# Altium PCB CL-KB-V1.2.pcbdoc (part 1 of 3)
Units mil, origin at the board's own origin, x right, y up, seen from the top; angles counter-clockwise.
Board outline 3269.95 x 5989.25 mil, 2 copper layers (Top Layer, Bottom Layer); 76 components, 86 nets, 398 pads, 855 vias.
Unrouted connection lines stored in the file: 1.
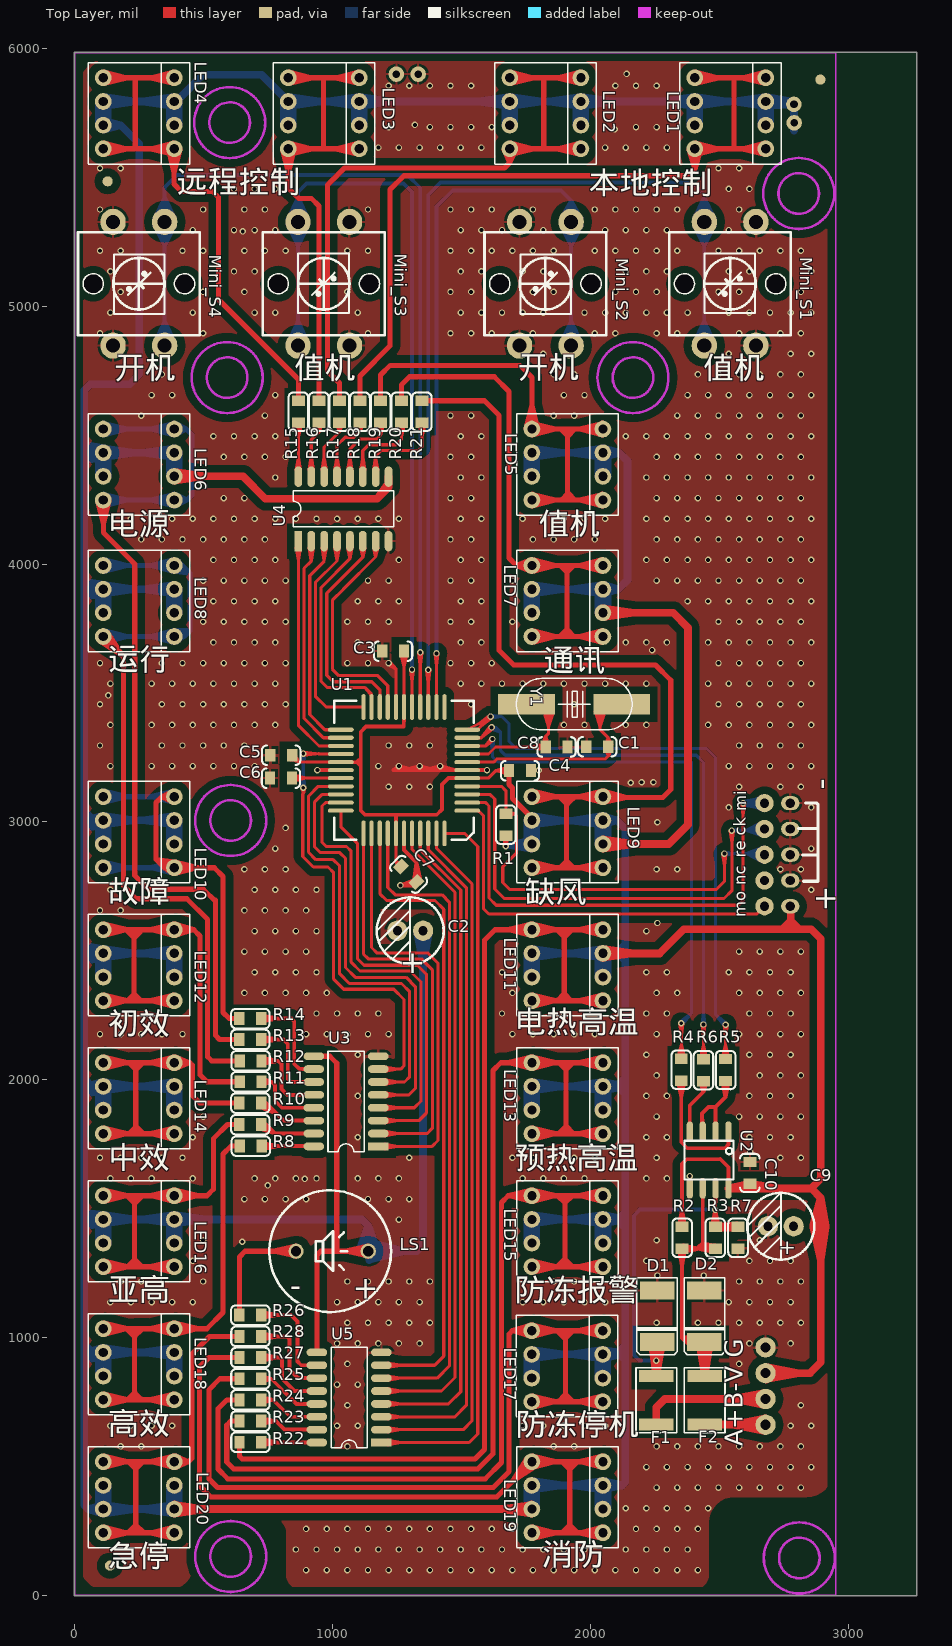
[diagram p0: Top Layer view]
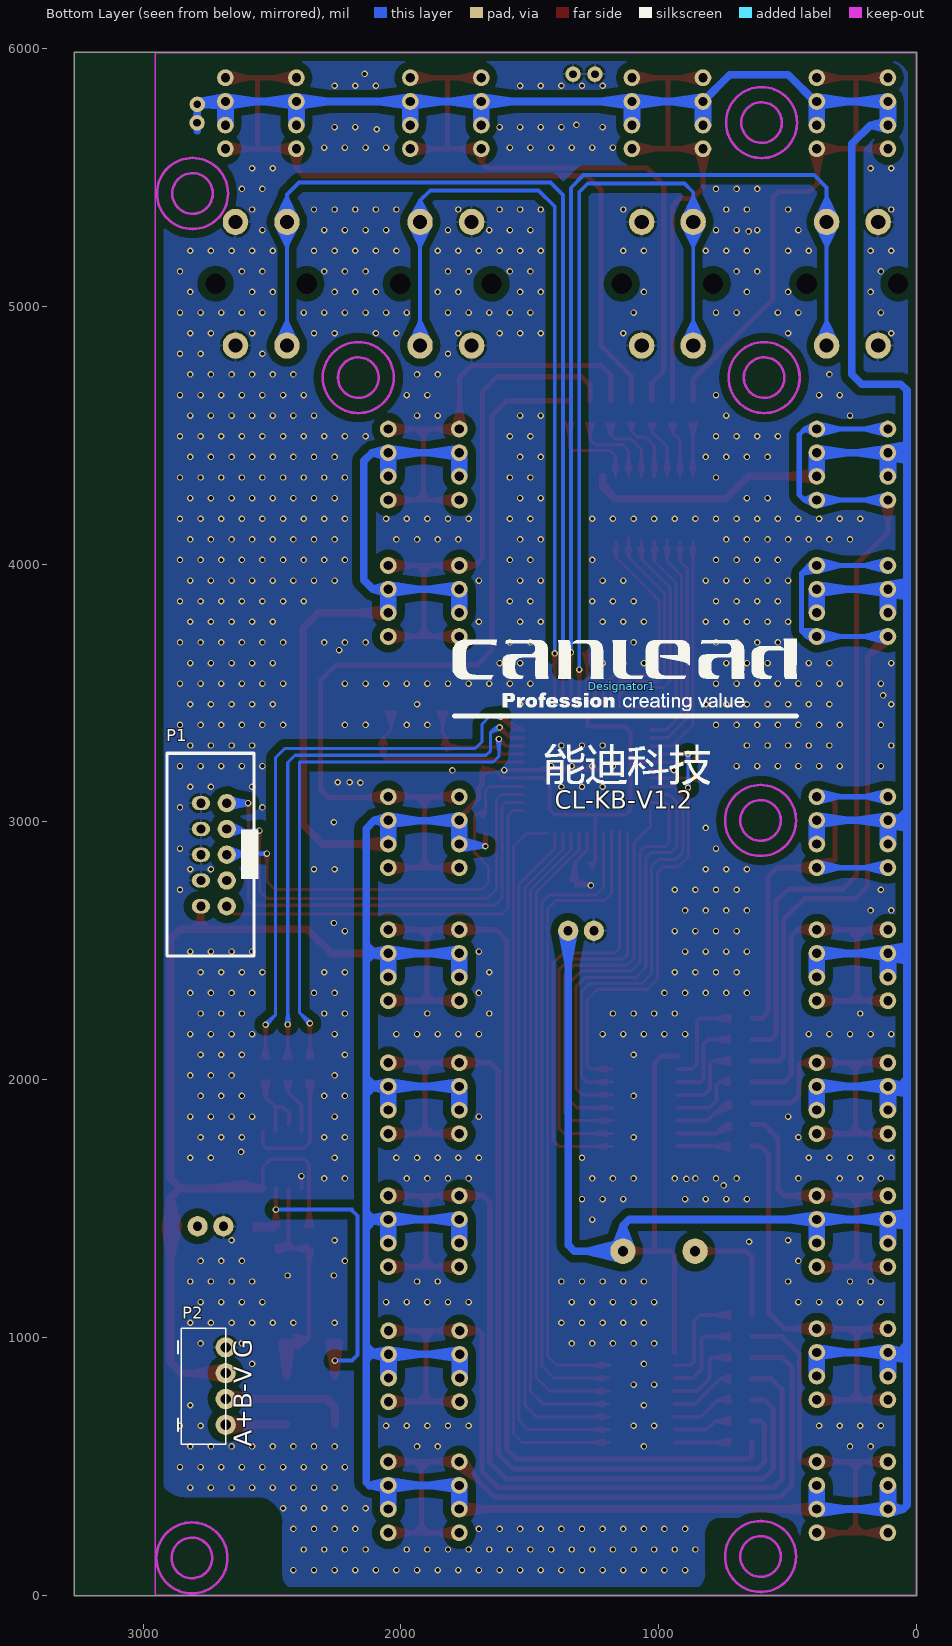
[diagram p1: Bottom Layer view, seen from below]

## Layer stack, top to bottom
Top Solder: solder mask 0.4, Solder Resist, Dk 3.5
Top Layer: signal copper 1.4
Dielectric1: core 12.6, FR-4, Dk 4.8
Bottom Layer: signal copper 1.4
Bottom Solder: solder mask 0.4, Solder Resist, Dk 3.5

## Board outline
-2.5,-2.5 3267.45,-2.5 3267.45,5986.75 -2.5,5986.75

## Design rules (kind name [scope] priority, off if disabled: settings)
Clearance Clearance_1 [All] p1 off: gap=30
Clearance [All] p2: gap=10
ComponentClearance [All] p1 off: gap=10 collisioncheckmode=3 verticalgap=10 showdistances=FALSE
FabricationTestPointUsage TestPointUsage [All] p1 off: valid=0 allowmultiple=FALSE
FabricationTestpoint Testpoint [All] p1 off: side=3 testpointundercomponent=TRUE minsize=40 maxsize=100 preferedsize=60 minholesize=0 maxholesize=40 preferedholesize=32 testpointgrid=1 allowsidetop=TRUE allowsidebottom=TRUE usegrid=TRUE gridtolerance=0.01
Height [All] p1 off: minheight=0 maxheight=1000 prefheight=500
HoleSize [All] p1 off: absolutevalues=TRUE maxlimit=100 minlimit=1 maxpercent=80.000 minpercent=20.000
LayerPairs [All] p1 off: enforce=TRUE
PolygonConnect PolygonConnect_1 [IsVia] p1: connectstyle=Direct reliefconductorwidth=10 reliefentries=4 polygonreliefangle="90 Angle" airgapwidth=10
PolygonConnect [All] p2: connectstyle=Relief reliefconductorwidth=10 reliefentries=4 polygonreliefangle="90 Angle" airgapwidth=10
RoomDefinition CL-KB-V1.2 [InComponentClass('CL-KB-V1.2')] p1: confinementstyle=ConfineIn formatcopy=TRUE lockcomponents=FALSE outline -17662.73,-10943.24 -15662.73,-10943.24 -15662.73,-9943.24 -17662.73,-9943.24
RoutingVias [All] p1: holewidth=28 width=50 viastyle="Through Hole" minholewidth=28 minwidth=50 maxholewidth=28 maxwidth=50
SolderMaskExpansion [All] p1: expansion=4
Width [All] p1: maxlimit=30 minlimit=10 preferedwidth=15 minimp=50.000000 maximp=50.000000 favimp=50.000000
23 further rules are at their usual default settings.

## Components (designator, comment, footprint, x,y, rotation, side; value= is the part's Value field where it differs from the comment)
C1 "22p" c0805c 2027,3292 r180 top
C2 "10uf" E6.5MM 1351,2578 r180 top
C3 "104" c0805c 1234.5,3663 r0 top
C4 "104" c0805c 1727,3199 r180 top
C5 "104" c0805c 800.5,3259 r180 top
C6 "104" c0805c 799.5,3170 r0 top
C7 "104" c0805c 1295,2797 r135 top
C8 "22p" c0805c 1869,3291 r0 top
C9 "104" c0805c 2619,1638 r90 top
C10 "220uf" E6.5MM 2789,1431 r180 top
D1 "SMBJ6.8" SMBJ_SMT 2259,1081.75 r270 top
D2 "SMBJ6.8" SMBJ_SMT 2442.97,1081.75 r270 top
Designator1 "Comment" ND 1143,3527 r180 bottom
F1 "X14" PPTC_SMT 2255.94,755.96 r90 top
F2 "X14" PPTC_SMT 2443.95,755.96 r90 top
LED1 "GREEN" PLED10*10 2543.28,5750 r0 top
LED2 "GREEN" PLED10*10 1825.56,5750 r0 top
LED3 "GREEN" PLED10*10 965.72,5750 r0 top
LED4 "GREEN" PLED10*10 248,5750 r0 top
LED5 "GREEN" PLED10*10 1910.99,4387.01 r0 top
LED6 "GREEN" PLED10*10 248,4387.01 r0 top
LED7 "GREEN" PLED10*10 1910.99,3857.48 r0 top
LED8 "GREEN" PLED10*10 248,3857.48 r0 top
LED9 "RED" PLED10*10 1910.99,2960.24 r0 top
LED10 "RED" PLED10*10 248,2960.24 r0 top
LED11 "RED" PLED10*10 1910.99,2444.09 r0 top
LED12 "RED" PLED10*10 248,2444.09 r0 top
LED13 "RED" PLED10*10 1910.99,1927.95 r0 top
LED14 "RED" PLED10*10 248,1927.95 r0 top
LED15 "RED" PLED10*10 1910.99,1411.81 r0 top
LED16 "RED" PLED10*10 248,1411.81 r0 top
LED17 "RED" PLED10*10 1910,888 r0 top
LED18 "RED" PLED10*10 248,895.67 r0 top
LED19 "RED" PLED10*10 1910.99,379.53 r0 top
LED20 "RED" PLED10*10 248,379.53 r0 top
LS1 "Speaker" SPK 1138,1334 r180 top
Mini_S1 "" KEYL 2542.28,5088.58 r270 top
Mini_S2 "" KEYL 1825.56,5088.58 r90 top
Mini_S3 "" KEYL 965.72,5088.58 r270 top
Mini_S4 "" KEYL 248,5088.58 r90 top
P1 "CON10" ISP 2726,2873 r270 bottom
P2 "Header 4" C3-4L 2680,811 r270 bottom
R1 "10K" 0805C 1672,3032 r270 top
R2 "3K" 0805C 2356,1429 r270 top
R3 "10K" 0805C 2485,1429 r270 top
R4 "100" 0805C 2353,1996 r90 top
R5 "100" 0805C 2525,1995 r90 top
R6 "100" 0805C 2439,1994 r90 top
R7 "3K" 0805C 2573,1344 r90 top
R8 "1K" 0805C 640,1742 r0 top
R9 "1K" 0805C 637.75,1825.54 r0 top
R10 "1K" 0805C 638,1909 r0 top
R11 "1K" 0805C 639,1992 r0 top
R12 "5.1K" 0805C 639,2073 r0 top
R13 "5.1K" 0805C 638,2156 r0 top
R14 "1K" 0805C 638,2237 r0 top
R15 "5.1K" 0805C 866.98,4634.52 r270 top
R16 "5.1K" 0805C 946.7,4634.52 r270 top
R17 "5.1K" 0805C 1026.43,4634.52 r270 top
R18 "5.1K" 0805C 1106.15,4634.52 r270 top
R19 "5.1K" 0805C 1185.88,4634.52 r270 top
R20 "5.1K" 0805C 1266.58,4634.52 r270 top
R21 "1K" 0805C 1346.31,4634.52 r270 top
R22 "1K" 0805C 638.45,593.17 r0 top
R23 "1K" 0805C 638.45,674.87 r0 top
R24 "1K" 0805C 638.45,757.55 r0 top
R25 "1K" 0805C 638.45,839.24 r0 top
R26 "3K" 0805C 723.09,1086.29 r180 top
R27 "1K" 0805C 638.45,921.92 r0 top
R28 "1K" 0805C 638.45,1003.61 r0 top
U1 "Atmega16" QFP44 1277,3201 r180 top
U2 "U485" SOP8 2461,1688 r180 top
U3 "2003" SO_16 1052,1916 r90 top
U4 "2003" SO_16 1042,4215 r0 top
U5 "2003" SO_16 1063.98,766.73 r90 top
Y1 "8M" XTP2 1937.27,3456.76 r0 top

## Footprints (in the part's own frame and the unit in brackets; to place one, negate y for a bottom-side part, rotate by r counter-clockwise, add the part's x,y. Pads: shape width x height; smd on the part's side, far side on the other; paste and mask are expansions set on the pad)
0805C [mil]
  rect 40x50 smd: 1(0,0) 2(85,0)
  silkscreen extent -32,-38 117,38
C3-4L [mm]
  round 2 hole 1: 1(-3.81,0) 2(-1.27,0) 3(1.27,0) 4(3.81,0)
  silkscreen extent -5.72,-4.7 5.71,0
c0805c [mil]
  rect 40x50 smd: 1(-42.5,0) 2(42.5,0)
  silkscreen extent -75,-38 75,38
E6.5MM [mm]
  round 2 hole 0.9: 1(0,0) 2(2.54,0)
  silkscreen extent -2.03,-3.3 4.57,3.3
ISP [mil]
  round 70.87 hole 36: 1(200,50) 3(100,50) 5(0,50) 7(-100,50) 9(-200,50)
  oval 55x70.87 hole 36: 2(200,-50) 4(100,-50) 6(0,-50) 8(-100,-50) 10(-200,-50)
  silkscreen extent -394,-181 394,173
KEYL [mil]
  round 65 hole 78.74 unplated: 0(0,177.17) 0(0,-177.17)
  oval 102x98 hole 55: 1(-240,-100) 1(240,-100) 2(-240,100) 2(240,100)
  silkscreen extent -200,-236 200,236
ND [mil]
  silkscreen extent -655,-382 679,182
PLED10*10 [mil]
  round 65 hole 36: A(-137.8,-45.93) A(-137.8,45.93) A(137.8,-45.93) A(137.8,45.93) K(-137.8,-137.8) K(-137.8,137.8) K(137.8,-137.8) K(137.8,137.8)
  silkscreen extent -197,-197 197,197
PPTC_SMT [mm]
  rect 1.2x3.4 smd: 1(-2.4,0) 2(2.4,0)
  silkscreen extent -3.2,-2 3.2,2
QFP44 [mil]
  oval 100x16 smd: 1(-245,157) 2(-245,126) 3(-245,94) 4(-245,63) 5(-245,31) 6(-245,0) 7(-245,-31) 8(-245,-63) 9(-245,-94) 10(-245,-126) 11(-245,-157) 23(245,-157) 24(245,-126) 25(245,-94) 26(245,-63) 27(245,-31) 28(245,0) 29(245,31) 30(245,63) 31(245,94) 32(245,126) 33(245,157)
  oval 16x100 smd: 12(-157,-245) 13(-126,-245) 14(-94,-245) 15(-63,-245) 16(-31,-245) 17(0,-245) 18(31,-245) 19(63,-245) 20(94,-245) 21(126,-245) 22(157,-245) 34(157,245) 35(126,245) 36(94,245) 37(63,245) 38(31,245) 39(0,245) 40(-31,245) 41(-63,245) 42(-94,245) 43(-126,245) 44(-157,245)
  silkscreen extent -270,-270 270,270
SMBJ_SMT [mil]
  rect 70x133.86 smd: A(-100,0) K(100,0)
  silkscreen extent -150,-79 149,79
SO_16 [mil]
  rect 30x80 smd: 1(-175,-125)
  oval 30x80 smd: 2(-125,-125) 3(-75,-125) 4(-25,-125) 5(25,-125) 6(75,-125) 7(125,-125) 8(175,-125) 9(175,125) 10(125,125) 11(75,125) 12(25,125) 13(-25,125) 14(-75,125) 15(-125,125) 16(-175,125)
  silkscreen extent -195,-70 195,70
SOP8 [mil]
  oval 24x80 smd: 1(-75,-110) 2(-25,-110) 3(25,-110) 4(75,-110) 5(75,110) 6(25,110) 7(-25,110) 8(-75,110)
  silkscreen extent -95,-75 95,75
SPK [mm]
  round 1.5 / inner round 1.5 / far side round 2.5 hole 1: 1(-0.007,-0.008) 2(7.105,-0.008)
  silkscreen extent -2.26,-6.01 9.74,5.99
XTP2 [mil]
  rect 220x80 smd: 1(-185,0) 2(185,0)
  silkscreen extent -225,-100 225,100

## Part data
C1 C3 C4 C5 C6 C7 C8 C9: library part Cap, "Capacitor"
C2 C10: library part "Cap Pol1", "Polarized Capacitor (Radial)"
D1 D2: library part DIODE, "Diode"
F1 F2: library part "Fuse 1", "Fuse"
LED1 LED2 LED3 LED4 LED5 LED6 LED7 LED8 LED9 LED10 LED11 LED12 LED13 LED14 LED15 LED16 LED17 LED18 LED19 LED20: library part LED, "Zener Diode"
LS1: "Loudspeaker"
Mini_S1 Mini_S2 Mini_S3 Mini_S4: library part SW-PB, "Switch"
P1: library part SPI10
P2: "Header, 4-Pin"
R1 R2 R3 R4 R5 R6 R7 R8 R9 R10 R11 R12 R13 R14 R15 R16 R17 R18 R19 R20 R21 R22 R23 R24 R25 R26 R27 R28: library part RES2
U3 U4 U5: library part ULN2003A, "High-Voltage, High-Current Darlington Array"
Y1: library part XTAL, "Crystal Oscillator"

## Free pads (board coordinates)
  round 60 hole 30: 0(1247,5902) 1(1332,5902) 3(2790,5785) 4(2791,5713)
  round 39.37 smd: 1(126.92,5486.07) 1(135.83,114.17) 1(2892.67,5880.75)
  round 86.61 on Top Solder: 2(126.92,5486.07) 2(135.83,114.17) 2(1231.25,219.34) 2(2605.27,69.73) 2(2892.67,5880.75)

## Via types
v1: diameter 25, hole 15, Top Layer to Bottom Layer, tented both sides, 855 vias

## Nets (pads, with @x,y where several pads share a name; then routed paths per layer and width w, separated by ;. In a path a pad name is that pad's centre, name@x,y a point inside that pad or via, vN(x,y) a via of type N, cw(c..) or ccw(c..) an arc to the next point about the centre after c; other vN are vias at no path point)
AREF: C6.2 U1.29 | length 346
  Top Layer w12: C6.2@842,3170 U1.29@1032,3170 ; C6.2@843.75,3156.11 898,3170 C6.2@843.75,3183.89 ; 946,3170 U1.29@990,3170
DE/RE: R5.2 U1.11 | length 3190.7
  Top Layer w12: v1@1606.51,3402.51 U1.11@1522,3358 1562,3358 v1(1613,3409) ; v1@1608.13,3413.31 1575.04,3371.04 ; v1@1609.32,3414.36 1569.32,3382.92 ; v1@1615.97,3403.22 1569.32,3382.92 ; v1@1617.31,3404.13 1575.04,3371.04 ; R5.2@2511.11,2081.75 2525,2136 R5.2@2538.89,2081.75 ; v1@2518.51,2212.56 2525,2164.5 ; R5.2@2525,2080 v1(2525,2213) 2525,2164.5 ; v1@2531.49,2212.56 2525,2164.5 ; 1569.32,3382.92 v1(1613,3409) ; 1575.04,3371.04 v1(1613,3409)
  Bottom Layer w12: v1(1613,3409) 1656,3409 ; v1@1613.49,3402.52 1656,3409 ; v1@1613.49,3415.48 1656,3409 ; v1@2520.13,2208.69 2487.04,2250.96 ; v1@2529.31,2217.87 2487.04,2250.96 ; 1656,3409 1685,3380 1685,3312 1712,3285 2451,3285 2486,3250 2486,2252 v1(2525,2213) 2487.04,2250.96
GND: C1.2 C2.2 C3.1 C4.1 C5.2 C6.1 C7.1 C8.2 C9.2 C10.2 D1.A D2.A Mini_S1.2 Mini_S2.2 Mini_S3.2 Mini_S4.2 P1.4 P1.6 P1.8 P1.10 P2.1 pad.0 pad.1@1332,5902 R7.1 U1.6 U1.18 U1.28 U1.39 U2.5 U3.8 U4.8 U5.8 | length 2285.9
  Top Layer w12: v1@1213.7,3611.32 1246,3594 ; v1(1217.27,3616.76) 1246,3594 ; v1@1220,3620 1246,3594 ; v1@1221.74,3621.48 1246,3594 ; U1.18@1246,3446 1246,3594 ; U1.18@1246,3488 1246,3532
  Top Layer w15: U1.28@990,3201 v1(941,3201) U1.28@1032,3201 ; 1273.62,3201 v1(1337.27,3216.76) 1401.56,3201 ; U1.39@1277,2914 1277,2891.5 ; U1.39@1277,2956 1277,2891.5 ; C7.1@1316.1,2770.97 1325.05,2840.23 ; C7.1@1318.24,2775.48 v1(1263,2754) ; C7.1@1321.52,2763.41 v1(1263,2754) ; 1321.8,3201 v1(1257.27,3216.76) 1235,3201 U1.6@1522,3201 v1(1599,3201) ; C7.1@1322.19,2750.93 v1(1263,2754) ; C7.1@1328.59,2770.48 1325.05,2840.23 ; C7.1@1340.96,2772.23 1325.05,2840.23 ; 1352.99,3201 v1(1417.27,3216.76) ; U1.6@1480.94,3201 v1(1417.27,3216.76) ; U1.6@1541.5,3201 v1(1599,3201) ; v1(1263,2754) 1312.1,2754 C7.1@1325.05,2766.95 1325.05,2843.45 1277,2891.5 ; v1(1417.27,3216.76) 1427,3201 1480,3201 v1(1417.27,3216.76) ; v1(1599,3201) 1564,3201 v1(1599,3201) ; v1(2386,1626) U2.5@2386,1578 v1(2386,1626) ; v1(2386,1626) 2386,1606 v1(2386,1626)
  other v1: 897.27,96.76 977.27,96.76 1057.27,96.76 1137.27,96.76 1217.27,96.76 1297.27,96.76 1377.27,96.76 1457.27,96.76 1537.27,96.76 1617.27,96.76 1697.27,96.76 1777.27,96.76 1857.27,96.76 1937.27,96.76 2017.27,96.76 2097.27,96.76 2177.27,96.76 2257.27,96.76 2337.27,96.76 2417.27,96.76 857.27,176.76 937.27,176.76 1017.27,176.76 1097.27,176.76 1177.27,176.76 1257.27,176.76 1337.27,176.76 1417.27,176.76 1497.27,176.76 1577.27,176.76 1657.27,176.76 1737.27,176.76 1817.27,176.76 1897.27,176.76 1977.27,176.76 2137.27,176.76 2217.27,176.76 2297.27,176.76 2377.27,176.76 897.27,256.76 977.27,256.76 1057.27,256.76 1137.27,256.76 1217.27,256.76 1297.27,256.76 1377.27,256.76 1457.27,256.76 1537.27,256.76 1617.27,256.76 1697.27,256.76 2177.27,256.76 2257.27,256.76 2337.27,256.76 2417.27,256.76 2137.27,336.76 2217.27,336.76 2297.27,336.76 2377.27,336.76 2457.27,336.76 2257.27,416.76 2337.27,416.76 2417.27,416.76 2497.27,416.76 2577.27,416.76 2657.27,416.76 2737.27,416.76 2817.27,416.76 2217.27,496.76 2297.27,496.76 2377.27,496.76 2457.27,496.76 2537.27,496.76 2617.27,496.76 2697.27,496.76 2777.27,496.76 2857.27,496.76 177.27,576.76 257.27,576.76 1057.27,576.76 1857.27,576.76 1937.27,576.76 2257.27,576.76 2337.27,576.76 2417.27,576.76 2497.27,576.76 2577.27,576.76 2657.27,576.76 2737.27,576.76 2817.27,576.76 137.27,656.76 217.27,656.76 297.27,656.76 377.27,656.76 1017.27,656.76 1097.27,656.76 1737.27,656.76 1817.27,656.76 1897.27,656.76 1977.27,656.76 2057.27,656.76 2777.27,656.76 2857.27,656.76 1057.27,736.76 2817.27,736.76 1017.27,816.76 1097.27,816.76 1057.27,896.76 2577.27,896.76 1017.27,976.76 1097.27,976.76 1177.27,976.76 1257.27,976.76 1337.27,976.76 2617.27,976.76 2777.27,976.76 1057.27,1056.76 1137.27,1056.76 1217.27,1056.76 1297.27,1056.76 1377.27,1056.76 2257.27,1056.76 2417.27,1056.76 2497.27,1056.76 2577.27,1056.76 2657.27,1056.76 2737.27,1056.76 2817.27,1056.76 137.27,1136.76 217.27,1136.76 297.27,1136.76 377.27,1136.76 457.27,1136.76 1017.27,1136.76 1097.27,1136.76 1177.27,1136.76 1257.27,1136.76 1337.27,1136.76 1737.27,1136.76 1817.27,1136.76 1897.27,1136.76 1977.27,1136.76 2057.27,1136.76 2537.27,1136.76 2617.27,1136.76 2697.27,1136.76 2777.27,1136.76 177.27,1216.76 257.27,1216.76 497.27,1216.76 1057.27,1216.76 1137.27,1216.76 1217.27,1216.76 1297.27,1216.76 1377.27,1216.76 1857.27,1216.76 1937.27,1216.76 2577.27,1216.76 2657.27,1216.76 2737.27,1216.76 2817.27,1216.76 2260,1240 2440,1240 457.27,1296.76 2217.27,1296.76 2617.27,1296.76 2697.27,1296.76 2777.27,1296.76 649,1371 497.27,1376.76 2257.27,1376.76 2657.27,1376.76 1257.27,1456.76 657.27,1536.76 737.27,1536.76 817.27,1536.76 897.27,1536.76 1137.27,1536.76 1217.27,1536.76 1297.27,1536.76 748,1590 892,1615 137.27,1616.76 217.27,1616.76 297.27,1616.76 457.27,1616.76 697.27,1616.76 777.27,1616.76 857.27,1616.76 937.27,1616.76 1097.27,1616.76 1177.27,1616.76 1257.27,1616.76 1737.27,1616.76 1817.27,1616.76 1897.27,1616.76 1977.27,1616.76 2217.27,1616.76 2297.27,1616.76 97.27,1696.76 177.27,1696.76 257.27,1696.76 337.27,1696.76 417.27,1696.76 1297.27,1696.76 1697.27,1696.76 1777.27,1696.76 1857.27,1696.76 1937.27,1696.76 2017.27,1696.76 2257.27,1696.76 2737.27,1696.76 2817.27,1696.76 2620,1720 457.27,1776.76 1097.27,1776.76 2217.27,1776.76 2297.27,1776.76 2617.27,1776.76 2697.27,1776.76 2777.27,1776.76 497.27,1856.76 1697.27,1856.76 2257.27,1856.76 2577.27,1856.76 2657.27,1856.76 2737.27,1856.76 2817.27,1856.76 1097.27,1936.76 2217.27,1936.76 2297.27,1936.76 2617.27,1936.76 2697.27,1936.76 2777.27,1936.76 2257.27,2016.76 2657.27,2016.76 2737.27,2016.76 2817.27,2016.76 1097.27,2096.76 2217.27,2096.76 2617.27,2096.76 2697.27,2096.76 2777.27,2096.76 97.27,2176.76 177.27,2176.76 257.27,2176.76 337.27,2176.76 417.27,2176.76 897.27,2176.76 977.27,2176.76 1057.27,2176.76 1137.27,2176.76 1217.27,2176.76 1697.27,2176.76 1777.27,2176.76 1857.27,2176.76 1937.27,2176.76 2017.27,2176.76 2257.27,2176.76 2577.27,2176.76 2657.27,2176.76 2737.27,2176.76 2817.27,2176.76 217.27,2256.76 937.27,2256.76 1017.27,2256.76 1097.27,2256.76 1177.27,2256.76 1657.27,2256.76 1897.27,2256.76 2217.27,2256.76 2297.27,2256.76 2617.27,2256.76 2697.27,2256.76 2777.27,2256.76 657.27,2336.76 737.27,2336.76 817.27,2336.76 897.27,2336.76 977.27,2336.76 1697.27,2336.76 2257.27,2336.76 2337.27,2336.76 2577.27,2336.76 2657.27,2336.76 2737.27,2336.76 2817.27,2336.76 697.27,2416.76 777.27,2416.76 857.27,2416.76 937.27,2416.76 1657.27,2416.76 2217.27,2416.76 2297.27,2416.76 2537.27,2416.76 2617.27,2416.76 2697.27,2416.76 2777.27,2416.76 657.27,2496.76 737.27,2496.76 817.27,2496.76 897.27,2496.76 1697.27,2496.76 2577.27,2496.76 2657.27,2496.76 2737.27,2496.76 2817.27,2496.76 697.27,2576.76 777.27,2576.76 857.27,2576.76 937.27,2576.76 2217.27,2576.76 2260,2608 97.27,2656.76 177.27,2656.76 657.27,2656.76 737.27,2656.76 817.27,2656.76 897.27,2656.76 137.27,2736.76 697.27,2736.76 777.27,2736.76 857.27,2736.76 937.27,2736.76 2857.27,2736.76 657.27,2816.76 737.27,2816.76 817.27,2816.76 2257.27,2816.76 2337.27,2816.76 2737.27,2816.76 2817.27,2816.76 777.27,2896.76 2857.27,2896.76 817.27,2976.76 2260,2999 2537.27,3056.76 2857.27,3056.76 1217.27,3136.76 1297.27,3136.76 1377.27,3136.76 2577.27,3136.76 2737.27,3136.76 2817.27,3136.76 2157,3152 2199,3154 2245,3154 1800,3200 137.27,3216.76 297.27,3216.76 377.27,3216.76 457.27,3216.76 537.27,3216.76 617.27,3216.76 697.27,3216.76 1177.27,3216.76 2537.27,3216.76 2617.27,3216.76 2697.27,3216.76 2777.27,3216.76 2857.27,3216.76 97.27,3296.76 337.27,3296.76 417.27,3296.76 497.27,3296.76 577.27,3296.76 657.27,3296.76 1217.27,3296.76 1297.27,3296.76 1377.27,3296.76 2577.27,3296.76 2657.27,3296.76 2737.27,3296.76 2817.27,3296.76 137.27,3376.76 297.27,3376.76 377.27,3376.76 457.27,3376.76 537.27,3376.76 617.27,3376.76 697.27,3376.76 777.27,3376.76 1897.27,3376.76 1977.27,3376.76 2137.27,3376.76 2217.27,3376.76 2457.27,3376.76 2537.27,3376.76 2617.27,3376.76 2697.27,3376.76 2777.27,3376.76 2857.27,3376.76 97.27,3456.76 337.27,3456.76 417.27,3456.76 497.27,3456.76 577.27,3456.76 657.27,3456.76 737.27,3456.76 817.27,3456.76 1537.27,3456.76 1937.27,3456.76 2497.27,3456.76 2577.27,3456.76 2657.27,3456.76 2737.27,3456.76 2817.27,3456.76 129,3491 137.27,3536.76 297.27,3536.76 377.27,3536.76 457.27,3536.76 537.27,3536.76 617.27,3536.76 697.27,3536.76 777.27,3536.76 1497.27,3536.76 1577.27,3536.76 1657.27,3536.76 1737.27,3536.76 1817.27,3536.76 1897.27,3536.76 1977.27,3536.76 2057.27,3536.76 2137.27,3536.76 2217.27,3536.76 2457.27,3536.76 2537.27,3536.76 2617.27,3536.76 2697.27,3536.76 2777.27,3536.76 2857.27,3536.76 97.27,3616.76 337.27,3616.76 417.27,3616.76 497.27,3616.76 577.27,3616.76 657.27,3616.76 737.27,3616.76 817.27,3616.76 1057.27,3616.76 1137.27,3616.76 1457.27,3616.76 1537.27,3616.76 1617.27,3616.76 2497.27,3616.76 2577.27,3616.76 2657.27,3616.76 2737.27,3616.76 2817.27,3616.76 2240,3667 537.27,3696.76 617.27,3696.76 697.27,3696.76 777.27,3696.76 1097.27,3696.76 1497.27,3696.76 1577.27,3696.76 2137.27,3696.76 2217.27,3696.76 2297.27,3696.76 2457.27,3696.76 2537.27,3696.76 2617.27,3696.76 2697.27,3696.76 2777.27,3696.76 2857.27,3696.76 497.27,3776.76 577.27,3776.76 657.27,3776.76 737.27,3776.76 817.27,3776.76 1057.27,3776.76 1137.27,3776.76 1217.27,3776.76 1457.27,3776.76 1537.27,3776.76 1697.27,3776.76 2497.27,3776.76 2577.27,3776.76 2657.27,3776.76 2737.27,3776.76 2817.27,3776.76 537.27,3856.76 617.27,3856.76 697.27,3856.76 777.27,3856.76 1097.27,3856.76 1177.27,3856.76 1257.27,3856.76 1497.27,3856.76 1577.27,3856.76 2377.27,3856.76 2457.27,3856.76 2537.27,3856.76 2617.27,3856.76 2697.27,3856.76 2777.27,3856.76 2857.27,3856.76 497.27,3936.76 577.27,3936.76 657.27,3936.76 737.27,3936.76 817.27,3936.76 1137.27,3936.76 1217.27,3936.76 1457.27,3936.76 1537.27,3936.76 1697.27,3936.76 2257.27,3936.76 2337.27,3936.76 2417.27,3936.76 2497.27,3936.76 2577.27,3936.76 2657.27,3936.76 2737.27,3936.76 2817.27,3936.76 537.27,4016.76 617.27,4016.76 697.27,4016.76 777.27,4016.76 1257.27,4016.76 1497.27,4016.76 1577.27,4016.76 2217.27,4016.76 2297.27,4016.76 2377.27,4016.76 2457.27,4016.76 2537.27,4016.76 2617.27,4016.76 2697.27,4016.76 2777.27,4016.76 2857.27,4016.76 257.27,4096.76 337.27,4096.76 417.27,4096.76 497.27,4096.76 577.27,4096.76 657.27,4096.76 737.27,4096.76 1457.27,4096.76 1537.27,4096.76 1777.27,4096.76 1857.27,4096.76 1937.27,4096.76 2017.27,4096.76 2257.27,4096.76 2337.27,4096.76 2417.27,4096.76 2497.27,4096.76 2577.27,4096.76 2657.27,4096.76 2737.27,4096.76 2817.27,4096.76 217.27,4176.76 297.27,4176.76 377.27,4176.76 457.27,4176.76 537.27,4176.76 617.27,4176.76 697.27,4176.76 777.27,4176.76 857.27,4176.76 937.27,4176.76 1017.27,4176.76 1097.27,4176.76 1177.27,4176.76 1257.27,4176.76 1497.27,4176.76 1577.27,4176.76 1737.27,4176.76 1817.27,4176.76 1897.27,4176.76 1977.27,4176.76 2057.27,4176.76 2217.27,4176.76 2297.27,4176.76 2377.27,4176.76 2457.27,4176.76 2537.27,4176.76 2617.27,4176.76 2697.27,4176.76 2777.27,4176.76 2857.27,4176.76 577.27,4256.76 657.27,4256.76 1457.27,4256.76 1537.27,4256.76 2257.27,4256.76 2337.27,4256.76 2417.27,4256.76 2497.27,4256.76 2577.27,4256.76 2657.27,4256.76 2737.27,4256.76 2817.27,4256.76 777.27,4336.76 1497.27,4336.76 1577.27,4336.76 2217.27,4336.76 2297.27,4336.76 2377.27,4336.76 2457.27,4336.76 2537.27,4336.76 2617.27,4336.76 2697.27,4336.76 2777.27,4336.76 2857.27,4336.76 577.27,4416.76 657.27,4416.76 737.27,4416.76 817.27,4416.76 1457.27,4416.76 1537.27,4416.76 2257.27,4416.76 2337.27,4416.76 2417.27,4416.76 2497.27,4416.76 2577.27,4416.76 2657.27,4416.76 2737.27,4416.76 2817.27,4416.76 537.27,4496.76 617.27,4496.76 697.27,4496.76 777.27,4496.76 1497.27,4496.76 1577.27,4496.76 2137.27,4496.76 2217.27,4496.76 2297.27,4496.76 2377.27,4496.76 2457.27,4496.76 2537.27,4496.76 2617.27,4496.76 2697.27,4496.76 2777.27,4496.76 2857.27,4496.76 257.27,4576.76 737.27,4576.76 1457.27,4576.76 1537.27,4576.76 1857.27,4576.76 1937.27,4576.76 2337.27,4576.76 2417.27,4576.76 2497.27,4576.76 2577.27,4576.76 2657.27,4576.76 2737.27,4576.76 2817.27,4576.76 297.27,4656.76 377.27,4656.76 777.27,4656.76 1897.27,4656.76 1977.27,4656.76 2377.27,4656.76 2457.27,4656.76 2537.27,4656.76 2617.27,4656.76 2697.27,4656.76 2777.27,4656.76 2857.27,4656.76 337.27,4736.76 1857.27,4736.76 1937.27,4736.76 2417.27,4736.76 2497.27,4736.76 2577.27,4736.76 2657.27,4736.76 2737.27,4736.76 2817.27,4736.76 1817.27,4816.76 2537.27,4816.76 2777.27,4816.76 2857.27,4816.76 97.27,4896.76 497.27,4896.76 1137.27,4896.76 1457.27,4896.76 1537.27,4896.76 1617.27,4896.76 1777.27,4896.76 2017.27,4896.76 2097.27,4896.76 2257.27,4896.76 2337.27,4896.76 2577.27,4896.76 2737.27,4896.76 2817.27,4896.76 137.27,4976.76 457.27,4976.76 537.27,4976.76 697.27,4976.76 777.27,4976.76 1097.27,4976.76 1497.27,4976.76 1577.27,4976.76 1657.27,4976.76 1737.27,4976.76 1817.27,4976.76 1977.27,4976.76 2057.27,4976.76 2137.27,4976.76 2217.27,4976.76 2297.27,4976.76 2377.27,4976.76 2537.27,4976.76 2617.27,4976.76 2697.27,4976.76 2777.27,4976.76 2857.27,4976.76 177.27,5056.76 497.27,5056.76 657.27,5056.76 1057.27,5056.76 1457.27,5056.76 1537.27,5056.76 1777.27,5056.76 1857.27,5056.76 2097.27,5056.76 2177.27,5056.76 2257.27,5056.76 2497.27,5056.76 2577.27,5056.76 2817.27,5056.76 137.27,5136.76 617.27,5136.76 697.27,5136.76 1497.27,5136.76 1577.27,5136.76 1737.27,5136.76 1817.27,5136.76 2137.27,5136.76 2217.27,5136.76 2297.27,5136.76 2537.27,5136.76 2617.27,5136.76 2857.27,5136.76 97.27,5216.76 177.27,5216.76 417.27,5216.76 497.27,5216.76 657.27,5216.76 737.27,5216.76 817.27,5216.76 1057.27,5216.76 1137.27,5216.76 1457.27,5216.76 1537.27,5216.76 1617.27,5216.76 1697.27,5216.76 1777.27,5216.76 1857.27,5216.76 2017.27,5216.76 2097.27,5216.76 2177.27,5216.76 2257.27,5216.76 2337.27,5216.76 2497.27,5216.76 2577.27,5216.76 2657.27,5216.76 2737.27,5216.76 2817.27,5216.76 651,5292 457.27,5296.76 617.27,5296.76 697.27,5296.76 777.27,5296.76 1497.27,5296.76 1577.27,5296.76 1657.27,5296.76 1817.27,5296.76 2057.27,5296.76 2137.27,5296.76 2217.27,5296.76 2297.27,5296.76 2537.27,5296.76 97.27,5376.76 497.27,5376.76 657.27,5376.76 737.27,5376.76 1137.27,5376.76 1457.27,5376.76 1537.27,5376.76 1617.27,5376.76 1777.27,5376.76 2017.27,5376.76 2097.27,5376.76 2177.27,5376.76 2257.27,5376.76 2337.27,5376.76 2577.27,5376.76 617.27,5456.76 697.27,5456.76 777.27,5456.76 2537.27,5456.76 2617.27,5456.76 97.27,5536.76 177.27,5536.76 2497.27,5536.76 2577.27,5536.76 1177.27,5616.76 1257.27,5616.76 1337.27,5616.76 1417.27,5616.76 1497.27,5616.76 1577.27,5616.76 2057.27,5616.76 2137.27,5616.76 2217.27,5616.76 2297.27,5616.76 2094,5688 1217.27,5696.76 1377.27,5696.76 1457.27,5696.76 1537.27,5696.76 1617.27,5696.76 2177.27,5696.76 2257.27,5696.76 1319,5705 1217.27,5856.76 1297.27,5856.76 1377.27,5856.76 1457.27,5856.76 1537.27,5856.76 2097.27,5856.76 2177.27,5856.76 2257.27,5856.76 2141,5903
IN-A+: F2.1 P2.4 | length 738
  Top Layer w30: F2.1@2443.95,661.47 2679.53,661.47 P2.4@2680,661 2550.63,661.47 ; F2.1@2487.26,661.47 2600.88,661.47 ; P2.4@2677.62,636.75 2550.63,661.47 ; P2.4@2677.79,685.27 2550.63,661.47
IN-B-: F1.1 P2.3 | length 892.3
  Top Layer w30: F1.1@2255.94,661.47 2255.94,727.94 2289,761 P2.3@2680,761 2550.63,761 ; P2.3@2677.7,736.74 2550.63,761 ; P2.3@2677.7,785.26 2550.63,761
KEY1: Mini_S1.1 U1.14 | length 5847
  Top Layer w12: v1@1364.51,3589.56 1371,3541.5 ; U1.14@1371,3446 v1(1371,3590) 1371,3541.5 ; U1.14@1371,3488 1371,3532 ; v1@1377.49,3589.56 1371,3541.5
  Bottom Layer w15: v1(1371,3590) 1371,5433 1419,5481 2396,5481 2442.28,5434.72 Mini_S1.1@2442.28,4848.58 ; Mini_S1.1@2401.8,4859.74 2442.28,4944.58 ; Mini_S1.1@2401.8,5317.42 2442.28,5232.58 ; Mini_S1.1@2401.8,5339.74 2442.28,5424.58 ; Mini_S1.1@2416.04,4854.32 2442.28,4944.58 ; Mini_S1.1@2416.04,5322.85 2442.28,5232.58 ; Mini_S1.1@2416.04,5334.32 2442.28,5424.58 ; Mini_S1.1@2430.8,4851.29 2442.28,4944.58 ; Mini_S1.1@2430.8,5325.88 2442.28,5232.58 ; Mini_S1.1@2430.8,5331.29 2442.28,5424.58 ; Mini_S1.1@2442.28,4850.58 2442.28,4944.58 ; Mini_S1.1@2442.28,5326.58 2442.28,5232.58 ; Mini_S1.1@2442.28,5330.58 2442.28,5424.58 ; Mini_S1.1@2453.75,4851.29 2442.28,4944.58 ; Mini_S1.1@2453.75,5325.88 2442.28,5232.58 ; Mini_S1.1@2453.75,5331.29 2442.28,5424.58 ; Mini_S1.1@2468.51,4854.32 2442.28,4944.58 ; Mini_S1.1@2468.51,5322.85 2442.28,5232.58 ; Mini_S1.1@2468.51,5334.32 2442.28,5424.58 ; Mini_S1.1@2482.75,4859.74 2442.28,4944.58 ; Mini_S1.1@2482.75,5317.42 2442.28,5232.58 ; Mini_S1.1@2482.75,5339.74 2442.28,5424.58
KEY2: Mini_S2.1 U1.13 | length 5141.4
  Top Layer w12: v1@1396.51,3653.56 1403,3605.5 ; U1.13@1403,3446 v1(1403,3654) 1403,3605.5 ; U1.13@1403,3488 1403,3532 ; v1@1409.49,3653.56 1403,3605.5
  Bottom Layer w15: v1(1403,3654) 1403,5388 1466,5451 1886,5451 1925.56,5411.44 ; Mini_S2.1@1885.08,4859.74 1925.56,4944.58 ; Mini_S2.1@1885.08,5317.42 1925.56,5232.58 ; Mini_S2.1@1885.45,5341.23 1925.56,5411.44 ; Mini_S2.1@1899.32,4854.32 1925.56,4944.58 ; Mini_S2.1@1899.32,5322.85 1925.56,5232.58 ; Mini_S2.1@1899.42,5334.93 1925.56,5411.44 ; Mini_S2.1@1914.08,4851.29 1925.56,4944.58 ; Mini_S2.1@1914.08,5325.88 1925.56,5232.58 ; Mini_S2.1@1914.09,5331.4 1925.56,5411.44 ; Mini_S2.1@1925.56,4848.58 1925.56,5411.44 ; Mini_S2.1@1925.56,4850.58 1925.56,4944.58 ; Mini_S2.1@1925.56,5326.58 1925.56,5232.58 ; Mini_S2.1@1925.56,5330.58 1925.56,5411.44 ; Mini_S2.1@1937.04,4851.29 1925.56,4944.58 ; Mini_S2.1@1937.04,5325.88 1925.56,5232.58 ; Mini_S2.1@1937.03,5331.4 1925.56,5411.44 ; Mini_S2.1@1951.7,5334.93 1925.56,5411.44 ; Mini_S2.1@1951.79,4854.32 1925.56,4944.58 ; Mini_S2.1@1951.79,5322.85 1925.56,5232.58 ; Mini_S2.1@1965.67,5341.23 1925.56,5411.44 ; Mini_S2.1@1966.04,4859.74 1925.56,4944.58 ; Mini_S2.1@1966.04,5317.42 1925.56,5232.58
KEY3: Mini_S3.1 U1.16 | length 5177.9
  Top Layer w12: v1@1301.51,3590.57 1308,3542.5 v1@1314.48,3590.57 ; U1.16@1308,3446 v1(1308,3591) ; U1.16@1308,3488 1308,3532
  Bottom Layer w15: Mini_S3.1@825.24,4859.74 865.72,4944.58 ; Mini_S3.1@825.24,5317.42 865.72,5232.58 ; Mini_S3.1@825.24,5339.74 865.72,5424.58 ; Mini_S3.1@839.48,4854.32 865.72,4944.58 ; Mini_S3.1@839.48,5322.85 865.72,5232.58 ; Mini_S3.1@839.48,5334.32 865.72,5424.58 ; Mini_S3.1@854.24,4851.29 865.72,4944.58 ; Mini_S3.1@854.24,5325.88 865.72,5232.58 ; Mini_S3.1@854.24,5331.29 865.72,5424.58 ; Mini_S3.1@865.72,4848.58 865.72,5443.72 899,5477 1275,5477 1308,5444 v1(1308,3591) ; Mini_S3.1@865.72,4850.58 865.72,4944.58 ; Mini_S3.1@865.72,5326.58 865.72,5232.58 ; Mini_S3.1@865.72,5330.58 865.72,5424.58 ; Mini_S3.1@877.19,4851.29 865.72,4944.58 ; Mini_S3.1@877.19,5325.88 865.72,5232.58 ; Mini_S3.1@877.19,5331.29 865.72,5424.58 ; Mini_S3.1@891.95,4854.32 865.72,4944.58 ; Mini_S3.1@891.95,5322.85 865.72,5232.58 ; Mini_S3.1@891.95,5334.32 865.72,5424.58 ; Mini_S3.1@906.19,4859.74 865.72,4944.58 ; Mini_S3.1@906.19,5317.42 865.72,5232.58 ; Mini_S3.1@906.19,5339.74 865.72,5424.58
KEY4: Mini_S4.1 U1.15 | length 5824.1
  Top Layer w12: v1@1333.51,3657.56 1340,3609.5 ; U1.15@1340,3446 v1(1340,3658) 1340,3609.5 ; U1.15@1340,3488 1340,3532 ; v1@1346.49,3657.56 1340,3609.5
  Bottom Layer w15: Mini_S4.1@307.52,4859.74 348,4944.58 ; Mini_S4.1@307.52,5317.42 348,5232.58 ; Mini_S4.1@307.52,5339.74 348,5424.58 ; Mini_S4.1@321.76,4854.32 348,4944.58 ; Mini_S4.1@321.76,5322.85 348,5232.58 ; Mini_S4.1@321.76,5334.32 348,5424.58 ; Mini_S4.1@336.52,4851.29 348,4944.58 ; Mini_S4.1@336.52,5325.88 348,5232.58 ; Mini_S4.1@336.52,5331.29 348,5424.58 ; Mini_S4.1@348,4848.58 348,5462 396,5510 1291,5510 1340,5461 v1(1340,3658) ; Mini_S4.1@348,4850.58 348,4944.58 ; Mini_S4.1@348,5326.58 348,5232.58 ; Mini_S4.1@348,5330.58 348,5424.58 ; Mini_S4.1@359.48,4851.29 348,4944.58 ; Mini_S4.1@359.48,5325.88 348,5232.58 ; Mini_S4.1@359.48,5331.29 348,5424.58 ; Mini_S4.1@374.24,4854.32 348,4944.58 ; Mini_S4.1@374.24,5322.85 348,5232.58 ; Mini_S4.1@374.24,5334.32 348,5424.58 ; Mini_S4.1@388.48,4859.74 348,4944.58 ; Mini_S4.1@388.48,5317.42 348,5232.58 ; Mini_S4.1@388.48,5339.74 348,5424.58
LAMP1: R8.2 U3.16 | length 391
  Top Layer w15: R8.2@725,1742 U3.16@926,1742 ; R8.2@726.2,1729.56 790,1742 R8.2@726.2,1754.44 ; 841.99,1742 U3.16@902,1741
LAMP2: R9.2 U3.15 | length 463.9
  Top Layer w15: R9.2@717.91,1809.02 777,1791 ; R9.2@722.75,1820.54 777,1791 ; R9.2@722.75,1825.54 742.46,1825.54 777,1791 ; R9.2@729.8,1830.86 777,1791 ; 842,1791 U3.15@902,1791 ; U3.15@927,1791 777,1791
LAMP3: R10.2 U3.14 | length 509.9
  Top Layer w15: R10.2@717.42,1892.82 784.9,1866.1 ; R10.2@723,1904 784.9,1866.1 ; R10.2@723,1909 742,1909 810,1841 U3.14@927,1841 ; R10.2@730.42,1914.06 784.9,1866.1 ; 842,1841 U3.14@902,1841
LAMP4: R11.2 U3.13 | length 418.6
  Top Layer w15: R11.2@724,1992 763,1992 ; R11.2@726,1979.66 763,1992 ; R11.2@726,2004.34 763,1992 ; 842,1891 U3.13@902,1891 ; U3.13@927,1891 803,1891 776,1918 776,1979 763,1992
LAMP5: R12.2 U3.12 | length 504.5
  Top Layer w15: R12.2@724,2073 789,2073 ; R12.2@725.2,2060.56 789,2073 ; R12.2@725.2,2085.44 789,2073 ; 842,1941 U3.12@902,1941 ; U3.12@927,1941 824,1941 801,1964 801,2061 789,2073
LAMP6: R13.2 U3.11 | length 542.6
  Top Layer w15: R13.2@723,2156 809,2156 826,2139 826,2002 837,1991 U3.11@927,1991 ; R13.2@724.2,2143.56 788,2156 R13.2@724.2,2168.44 ; 842,1991 U3.11@902,1991
LAMP7: R14.2 U3.10 | length 542.8
  Top Layer w15: R14.2@723,2237 840,2237 851,2226 851,2061 871,2041 ; R14.2@724.2,2224.56 788,2237 R14.2@724.2,2249.44 ; U3.10@902,2041 871,2041 ; U3.10@927,2041 871,2041
LAMP8: R15.2 U4.16 | length 530.5
  Top Layer w12: R15.2@853.09,4547.77 867,4493.52 ; U4.16@858.04,4365.79 867,4416 ; R15.2@866.98,4549.52 867,4493.52 ; U4.16@867,4340 R15.2@867,4549.5 ; U4.16@867,4365 867,4416 ; U4.16@875.96,4365.79 867,4416 ; R15.2@880.87,4547.78 867,4493.52
LAMP9: R16.2 U4.15 | length 485.3
  Top Layer w12: U4.15@908.04,4365.79 917,4416 ; U4.15@917,4340 917,4483 946.7,4512.7 ; U4.15@917,4365 917,4416 ; U4.15@925.96,4365.79 917,4416 ; R16.2@932.96,4546.86 946.7,4512.7 ; R16.2@960.45,4546.86 946.7,4512.7 ; 946.7,4512.7 R16.2@946.7,4549.52 946.7,4512.7
LAMP10: R17.2 U4.14 | length 492.4
  Top Layer w12: U4.14@958.04,4365.79 967,4416 ; U4.14@967,4340 967,4455 1026.43,4514.43 ; U4.14@967,4365 967,4416 ; U4.14@975.96,4365.79 967,4416 ; R17.2@1012.71,4546.73 1026.43,4514.43 ; R17.2@1040.15,4546.73 1026.43,4514.43 ; 1026.43,4514.43 R17.2@1026.43,4549.52 1026.43,4514.43
LAMP11: R18.2 U4.13 | length 515.9
  Top Layer w12: U4.13@1008.04,4365.79 1017,4416 ; U4.13@1017,4340 1017,4461 1049,4493 1082,4493 1106.15,4517.15 ; U4.13@1017,4365 1017,4416 ; U4.13@1025.96,4365.79 1017,4416 ; R18.2@1092.48,4546.49 1106.15,4517.15 ; R18.2@1119.82,4546.49 1106.15,4517.15 ; 1106.15,4517.15 R18.2@1106.15,4549.52 1106.15,4517.15
LAMP12: R19.2 U4.12 | length 595.7
  Top Layer w12: U4.12@1058.04,4365.79 1067,4416 ; U4.12@1067,4340 1067,4446.89 1106.11,4486 1171,4486 1185.88,4500.88 ; U4.12@1067,4365 1067,4416 ; U4.12@1075.96,4365.79 1067,4416 ; R19.2@1172.02,4547.51 1185.88,4500.88 ; R19.2@1199.73,4547.51 1185.88,4500.88 ; 1185.88,4500.88 R19.2@1185.88,4549.52 1185.88,4500.88
LAMP13: R20.2 U4.11 | length 654.6
  Top Layer w12: U4.11@1108.04,4365.79 1117,4416 ; U4.11@1117,4340 1117,4441 1140,4464 1246,4464 1266.58,4484.58 R20.2@1266.58,4549.52 1266.58,4493.52 ; U4.11@1117,4365 1117,4416 ; U4.11@1125.96,4365.79 1117,4416 ; R20.2@1252.69,4547.77 1266.58,4493.52 ; R20.2@1280.47,4547.77 1266.58,4493.52
LAMP14: R21.2 U4.10 | length 689.1
  Top Layer w12: U4.10@1158.04,4365.79 1167,4416 ; U4.10@1167,4340 1167,4420 1189,4442 1333,4442 1346.31,4455.31 R21.2@1346.31,4549.52 1346.31,4493.52 ; U4.10@1167,4365 1167,4416 ; U4.10@1175.96,4365.79 1167,4416 ; R21.2@1332.42,4547.77 1346.31,4493.52 ; R21.2@1360.2,4547.77 1346.31,4493.52
LAMP15: R22.2 U5.16 | length 471.3
  Top Layer w15: R22.2@724.37,580.71 788.49,591.73 ; R22.2@724.92,605.59 788.49,591.73 ; 853.98,591.73 U5.16@913.98,591.73 ; U5.16@938.98,591.73 724.89,591.73 R22.2@723.45,593.17 788.49,591.73
LAMP16: R23.2 U5.15 | length 402.1
  Top Layer w15: R23.2@723.45,674.87 779.86,674.87 ; R23.2@724.83,662.44 779.86,674.87 ; R23.2@724.83,687.29 779.86,674.87 ; 853.98,641.73 U5.15@913.98,641.73 ; U5.15@938.98,641.73 812.99,641.73 779.86,674.87
LAMP17: R24.2 U5.14 | length 394.8
  Top Layer w15: R24.2@723.45,757.55 769.45,757.55 ; R24.2@725.15,745.16 769.45,757.55 ; R24.2@725.15,769.93 769.45,757.55 ; 853.98,691.73 U5.14@913.98,691.73 ; U5.14@938.98,691.73 835.27,691.73 769.45,757.55
LAMP18: R25.2 U5.13 | length 387.3
  Top Layer w15: R25.2@723.45,839.24 761.76,839.24 ; R25.2@725.49,826.91 761.76,839.24 ; R25.2@725.49,851.57 761.76,839.24 ; U5.13@913.98,741.73 859.27,741.73 ; U5.13@938.98,741.73 859.27,741.73 ; 761.76,839.24 859.27,741.73
LAMP19: R27.2 U5.12 | length 502
  Top Layer w15: R27.2@723.45,921.92 794.08,921.92 803,913 803,840.43 851.69,791.73 U5.12@938.98,791.73 ; R27.2@724.65,909.47 788.45,921.92 R27.2@724.65,934.36 ; 853.98,791.73 U5.12@913.98,791.73
LAMP20: R28.2 U5.11 | length 529.4
  Top Layer w15: R28.2@723.45,1003.61 822.39,1003.61 833,993 833,875 866.27,841.73 ; R28.2@724.65,991.17 788.45,1003.61 R28.2@724.65,1016.05 ; U5.11@913.98,841.73 866.27,841.73 ; U5.11@938.98,841.73 866.27,841.73
LAMP21: R26.1 U5.10 | length 553.4
  Top Layer w15: R26.1@723.09,1086.29 838.71,1086.29 863,1062 863,906.72 877.98,891.73 ; R26.1@724.3,1073.84 788.09,1086.29 R26.1@724.3,1098.73 ; U5.10@913.98,891.73 877.98,891.73 ; U5.10@938.98,891.73 877.98,891.73
LEDK1: LED4.K R15.1 | length 3276.8
  Top Layer w20: LED4.K@110.2,5612.2 LED4.K@385.8,5612.2 ; LED4.K@110.2,5887.8 LED4.K@385.8,5887.8 293.3,5887.8 ; LED4.K@112.94,5589.87 202.7,5612.2 LED4.K@112.94,5634.54 ; LED4.K@112.94,5865.46 202.7,5887.8 LED4.K@112.94,5910.13 ; 234,5614.2 234,5887.8 ; LED4.K@363.41,5609.9 384,5519.67 ; LED4.K@383.06,5589.87 293.3,5612.2 ; LED4.K@383.06,5634.54 293.3,5612.2 ; LED4.K@383.06,5865.46 293.3,5887.8 ; LED4.K@383.06,5910.13 293.3,5887.8 ; LED4.K@408.07,5609.04 384,5519.67 ; R15.1@866.98,4634.52 866.98,4717.02 557,5027 557,5424 535,5446 414,5446 384,5476 384,5610.41 LED4.K@385.8,5612.2 ; 293.3,5612.2 LED4.K@385.8,5612.2 ; 384,5519.67 LED4.K@385.8,5612.2
LEDK2: LED3.K R16.1 | length 3085.7
  Top Layer w20: LED3.K@805.59,5609.47 827.92,5519.7 ; LED3.K@827.92,5887.8 LED3.K@1103.51,5887.8 1011.01,5887.8 ; LED3.K@830.66,5589.87 920.42,5612.2 LED3.K@830.66,5634.54 ; LED3.K@830.66,5865.46 920.42,5887.8 LED3.K@830.66,5910.13 ; LED3.K@850.25,5609.47 827.92,5519.7 ; R16.1@946.7,4634.52 946.7,5390.3 917,5420 868,5420 827.92,5460.08 LED3.K@827.92,5612.2 ; 964,5887.8 964,5614.2 966,5612.2 ; LED3.K@1100.78,5589.87 1011.01,5612.2 ; LED3.K@1100.78,5634.54 1011.01,5612.2 ; LED3.K@1100.78,5865.46 1011.01,5887.8 ; LED3.K@1100.78,5910.13 1011.01,5887.8 ; 827.92,5519.7 LED3.K@827.92,5612.2 ; LED3.K@827.92,5612.2 LED3.K@1103.51,5612.2 1011.01,5612.2
LEDK3: LED2.K R17.1 | length 3565
  Top Layer w20: R17.1@1026.43,4634.52 1026.43,4703.57 980,4750 980,5472 1046,5538 1667,5538 1687.76,5558.76 ; LED2.K@1665.77,5607.47 1687.76,5558.76 ; LED2.K@1687.76,5887.8 LED2.K@1963.35,5887.8 1870.85,5887.8 ; LED2.K@1690.5,5589.87 1780.26,5612.2 LED2.K@1690.5,5634.54 ; LED2.K@1690.5,5865.46 1780.26,5887.8 LED2.K@1690.5,5910.13 ; LED2.K@1709.76,5607.47 1687.76,5558.76 ; 1819,5613.2 1819,5887.8 ; LED2.K@1960.62,5589.87 1870.85,5612.2 ; LED2.K@1960.62,5634.54 1870.85,5612.2 ; LED2.K@1960.62,5865.46 1870.85,5887.8 ; LED2.K@1960.62,5910.13 1870.85,5887.8 ; 1687.76,5558.76 LED2.K@1687.76,5612.2 ; 1687.76,5558.76 LED2.K@1687.76,5612.2 ; LED2.K@1687.76,5612.2 LED2.K@1963.35,5612.2 1870.85,5612.2